# Altium PCB WIFI.PcbDoc
Units mm, origin at the board's own origin, x right, y up, seen from the top; angles counter-clockwise.
Board outline 22.21 x 24 mm, 2 copper layers (Top Layer, Bottom Layer); 9 components, 17 nets, 49 pads, 99 vias.
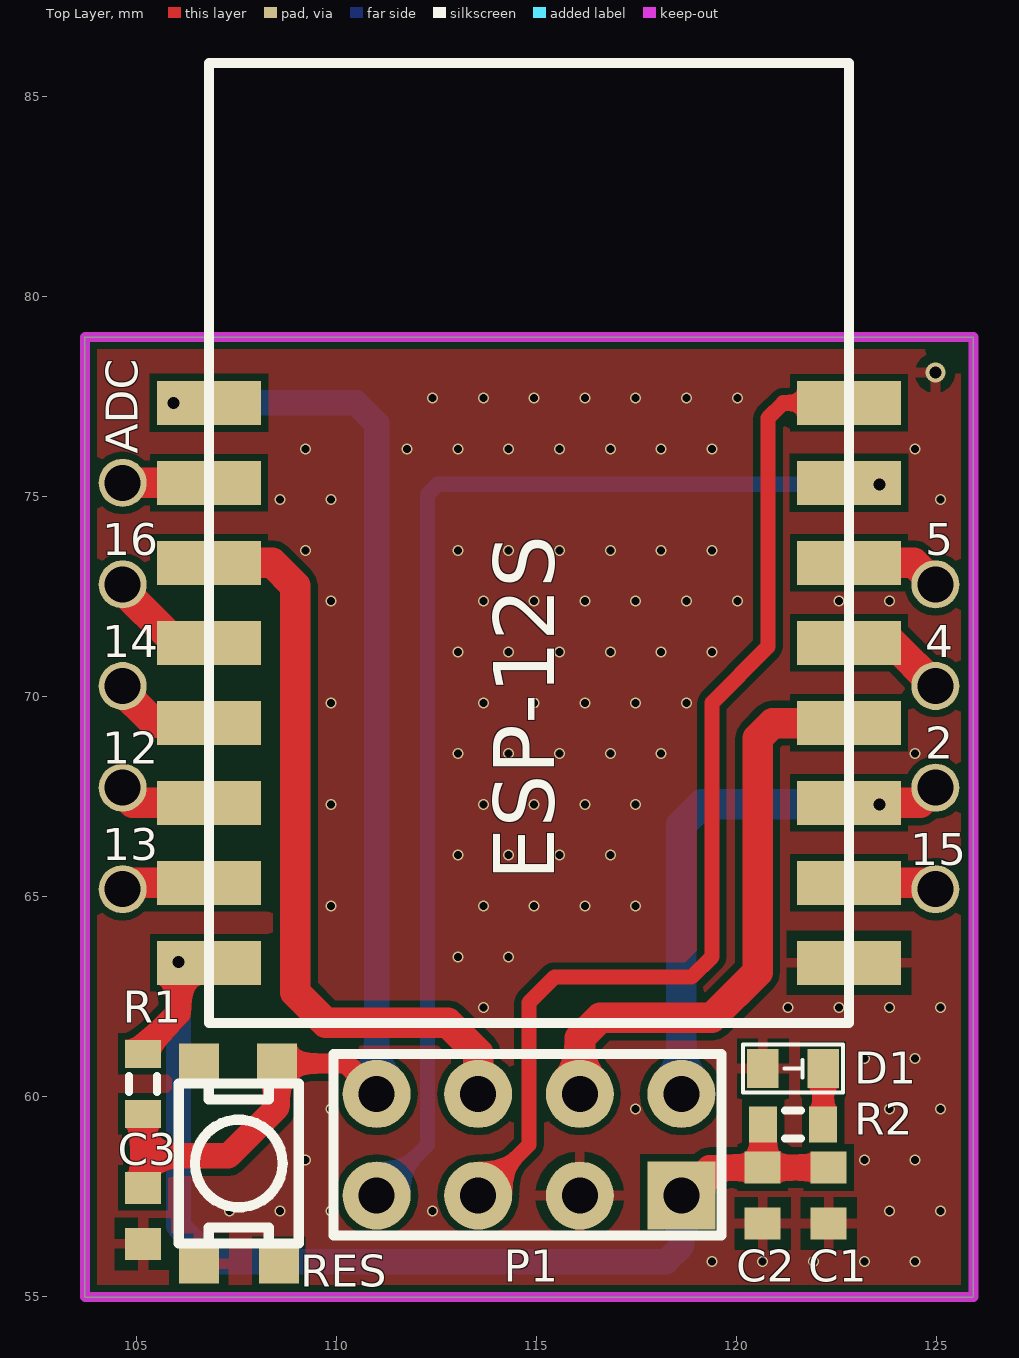
[diagram p0: Top Layer view]
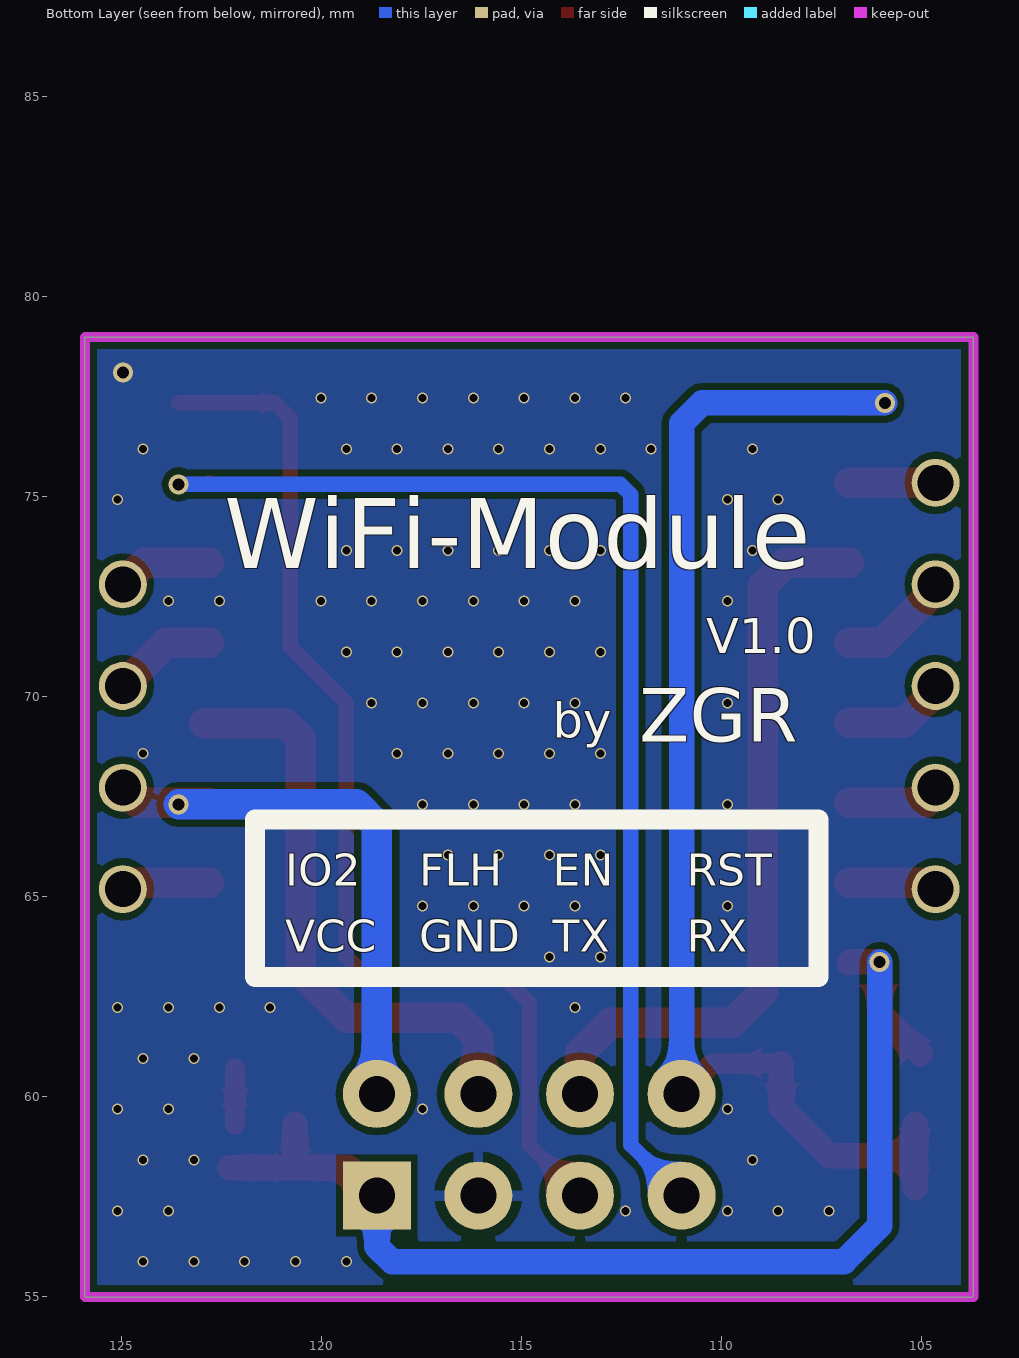
[diagram p1: Bottom Layer view, seen from below]

## Layer stack, top to bottom
Top Solder: solder mask 0.0102, Solder Resist, Dk 3.5
Top Layer: signal copper 0.0356
Dielectric 1: dielectric 0.32, FR-4, Dk 4.8
Bottom Layer: signal copper 0.0356
Bottom Solder: solder mask 0.0102, Solder Resist, Dk 3.5

## Board outline
103.703,54.991 125.917,54.991 125.917,78.994 103.703,78.994

## Design rules (kind name [scope] priority, off if disabled: settings)
Clearance [All] p1: gap=0.178 ignorepadtopadclearanceinfootprint=FALSE
ComponentClearance [All] p1: gap=0.178 collisioncheckmode=3 verticalgap=0.254 showdistances=FALSE
PolygonConnect [All] p1: connectstyle=Relief reliefconductorwidth=0.254 reliefentries=4 polygonreliefangle="90 Angle" airgapwidth=0.254
RoutingVias [All] p1: holewidth=0.711 width=1.27 viastyle="Through Hole" minholewidth=0.2 minwidth=0.275 maxholewidth=0.711 maxwidth=1.27
SolderMaskExpansion [All] p1: expansion=0.102
Width [All] p1: maxlimit=1.016 minlimit=0.178 preferedwidth=0.254 minimp=50.000000 maximp=50.000000 favimp=50.000000
29 further rules are at their usual default settings.

## Components (designator, comment, footprint, x,y, rotation, side; value= is the part's Value field where it differs from the comment)
C1 "Cap Semi" 1608[0603] 122.301,57.531 r270 top value=0.1uf
C2 "Cap Semi" 1608[0603] 120.65,57.531 r270 top value=10uf
C3 "Cap Semi" 1608[0603] 105.156,57.023 r270 top value=0.1uf
D1 "LED" SMD-0603_LED 122.162,60.706 r180 top (schematic designator LED1)
ESP-12S "ESP-12S" ESP-12S 106.807,61.849 r0 top
P1 "Head_4x2" Header_2.54_4*2 118.618,57.531 r180 top
R1 "Res3" J1-0603 105.156,60.325 r90 top value=10K
R2 "Res3" J1-0603 121.412,59.309 r180 top value=10K
RES "SW_Button" "TACK-SW_SMD 2P 4x3mm_2" 109.053,56.333 r180 top (schematic designator SB1)

## Footprints (in the part's own frame and the unit in brackets; to place one, negate y for a bottom-side part, rotate by r counter-clockwise, add the part's x,y. Pads: shape width x height; smd on the part's side, far side on the other; paste and mask are expansions set on the pad)
1608[0603] [mm] "Chip Capacitor, Body 1.6x0.8mm, IPC High Density"
  rect 0.8x0.9 smd: 1(-0.7,0) 2(0.7,0)
  body extent -0.87,-0.48 0.87,0.48, height 1.3
ESP-12S [mm]
  rect 2.6x1.1 smd: 1(0,15.5) 2(0,13.5) 3(0,11.5) 4(0,9.5) 5(0,7.5) 6(0,5.5) 7(0,3.5) 8(0,1.5) 9(16,1.5) 10(16,3.5) 11(16,5.5) 12(16,7.5) 13(16,9.5) 14(16,11.5) 15(16,13.5) 16(16,15.5)
  silkscreen extent 0,0 16,24
Header_2.54_4*2 [mm]
  round 1.7 hole 0.9: 1(0,-2.54) 2(2.54,-2.54) 3(5.08,-2.54) 4(7.62,-2.54) 5(7.62,0) 6(5.08,0) 7(2.54,0)
  rect 1.7x1.7 hole 0.9: 8(0,0)
  silkscreen extent -1,-3.54 8.7,1
J1-0603 [mm] "Chip Resistor, Body 1.6x0.8mm, IPC High Density"
  rect 0.7x0.9 smd: 1(-0.75,0) 2(0.75,0)
  silkscreen extent -0.2,-0.35 0.2,0.35, body extent -0.85,-0.48 0.85,0.48, height 0.9
SMD-0603_LED [mm]
  rect 0.78x0.98 smd: 1(0,0) 2(1.51,0)
  silkscreen extent -0.5,-0.6 2,0.6
"TACK-SW_SMD 2P 4x3mm_2" [mm]
  rect 1x1 smd: 1(0.5,0.5) 1(0.55,-4.5) 2(2.5,0.5) 2(2.5,-4.5)
  silkscreen extent 0,-4 3,0

## Part data
C1 C2 C3: "Capacitor (Semiconductor SIM Model)", LatestRevisionDate=29-May-2009, LatestRevisionNote="IPC-7351 Footprint Added.", PackageDescription="Chip Capacitor", PackageReference=C1206, Published=8-Jun-2000, Publisher="Altium Limited"
R1 R2: "Resistor", LatestRevisionDate=29-May-2009, LatestRevisionNote="IPC-7351 Footprint Added.", PackageDescription="Chip Resistor", PackageReference=J1-0603, Published=8-Jun-2000, Publisher="Altium Limited"

## Free pads (board coordinates)
  round 1.2 hole 0.9: ""(104.648,65.189) ""(104.648,67.729) ""(104.648,70.269) ""(104.648,72.809) ""(104.648,75.349) ""(124.968,65.189) ""(124.968,67.729) ""(124.968,70.269) ""(124.968,72.809)

## Via types
v1: diameter 0.275, hole 0.2, Top Layer to Bottom Layer, tented both sides, 94 vias
v2: diameter 0.5, hole 0.3, Top Layer to Bottom Layer, tented both sides, 5 vias

## Nets (pads, with @x,y where several pads share a name; then routed paths per layer and width w, separated by ;. In a path a pad name is that pad's centre, name@x,y a point inside that pad or via, vN(x,y) a via of type N, cw(c..) or ccw(c..) an arc to the next point about the centre after c; other vN are vias at no path point)
ADC: ESP-12S.2 pad.@104.648,75.349 | length 2.3
  Top Layer w0.762: pad.@104.521,75.349 ESP-12S.2
EN: ESP-12S.3 P1.3 | length 18.8
  Top Layer w0.762: ESP-12S.3 108.388,73.349 108.966,72.771 108.966,62.611 109.728,61.849 112.776,61.849 113.538,61.087 P1.3
flash_mode: ESP-12S.12 P1.2 | length 14.9
  Top Layer w0.762: P1.2 116.078,61.468 116.586,61.976 119.38,61.976 120.523,63.119 120.523,68.961 120.904,69.342 ESP-12S.12@122.936,69.342
GND: C1.2 C2.2 C3.2 D1.2 ESP-12S.9 P1.7 RES.2@106.553,55.833
  other v1: 119.38,55.88 120.65,55.88 121.92,55.88 123.19,55.88 124.46,55.88 107.315,57.15 108.585,57.15 109.855,57.15 112.395,57.15 123.825,57.15 125.095,57.15 109.22,58.42 123.19,58.42 124.46,58.42 109.855,59.69 117.475,59.69 123.825,59.69 125.095,59.69 123.19,60.96 124.46,60.96 113.665,62.23 121.285,62.23 122.555,62.23 123.825,62.23 125.095,62.23 113.03,63.5 114.3,63.5 109.855,64.77 113.665,64.77 114.935,64.77 116.205,64.77 117.475,64.77 113.03,66.04 114.3,66.04 115.57,66.04 116.84,66.04 109.855,67.31 113.665,67.31 114.935,67.31 116.205,67.31 117.475,67.31 113.03,68.58 114.3,68.58 115.57,68.58 116.84,68.58 118.11,68.58 124.46,68.58 109.855,69.85 113.665,69.85 114.935,69.85 116.205,69.85 117.475,69.85 118.745,69.85 113.03,71.12 114.3,71.12 115.57,71.12 116.84,71.12 118.11,71.12 119.38,71.12 109.855,72.39 113.665,72.39 114.935,72.39 116.205,72.39 117.475,72.39 118.745,72.39 120.015,72.39 122.555,72.39 123.825,72.39 109.22,73.66 113.03,73.66 114.3,73.66 115.57,73.66 116.84,73.66 118.11,73.66 119.38,73.66 108.585,74.93 109.855,74.93 125.095,74.93 109.22,76.2 111.76,76.2 113.03,76.2 114.3,76.2 115.57,76.2 116.84,76.2 118.11,76.2 119.38,76.2 124.46,76.2 112.395,77.47 113.665,77.47 114.935,77.47 116.205,77.47 117.475,77.47 118.745,77.47 120.015,77.47
  other v2: 124.968,78.105
IO2: ESP-12S.11 P1.1 pad.@124.968,67.729 | length 14.2
  Top Layer w0.762: ESP-12S.11 124.588,67.349 pad.@124.968,67.729
  Bottom Layer w0.762: P1.1 118.618,66.802 119.126,67.31 v2(123.571,67.31)
IO4: ESP-12S.13 pad.@124.968,70.269 | length 2.6
  Top Layer w0.762: ESP-12S.13 123.888,71.349 pad.@124.968,70.269
IO5: ESP-12S.14 pad.@124.968,72.809 | length 2.4
  Top Layer w0.762: ESP-12S.14 124.428,73.349 pad.@124.968,72.809
IO12: ESP-12S.6 pad.@104.648,67.729 | length 2.4
  Top Layer w0.762: pad.@104.521,67.729 104.901,67.349 ESP-12S.6
IO13: ESP-12S.7 pad.@104.648,65.189 | length 2.2
  Top Layer w0.762: pad.@104.648,65.189 104.808,65.349 ESP-12S.7
IO14: ESP-12S.5 pad.@104.648,70.269 | length 2.7
  Top Layer w0.762: pad.@104.521,70.269 105.441,69.349 ESP-12S.5
IO15: ESP-12S.10 pad.@124.968,65.189 | length 2.2
  Top Layer w0.762: ESP-12S.10 124.808,65.349 pad.@124.968,65.189
IO16: ESP-12S.4 pad.@104.648,72.809 | length 2.9
  Top Layer w0.762: pad.@104.521,72.809 105.981,71.349 ESP-12S.4
NetLED1_1: D1.1 R2.1 | length 1.4
  Top Layer w0.508: R2.1 D1.1
RST: C3.1 ESP-12S.1 P1.4 R1.1 RES.1@108.503,60.833 | length 32.3
  Top Layer w0.508: RES.1@108.503,60.833 110.236,60.833 P1.4
  Top Layer w0.635: C3.1 105.156,58.522 ; R1.1@105.156,59.321 105.156,58.522 ; v2(105.918,77.349) ESP-12S.1 ; RES.1@108.503,60.833 108.503,59.735 107.29,58.522 105.156,58.522
  Bottom Layer w0.635: v2(105.918,77.349) 110.484,77.349 110.998,76.835 P1.4
RX: ESP-12S.15 P1.5 | length 30.2
  Top Layer w0.381: ESP-12S.15 122.845,75.311 v2(123.571,75.311)
  Bottom Layer w0.381: P1.5 112.268,58.801 112.268,75.057 112.522,75.311 v2(123.571,75.311)
TX: ESP-12S.16 P1.6 | length 27.4
  Top Layer w0.381: P1.6 114.808,58.801 114.808,62.357 115.443,62.992 118.872,62.992 119.38,63.5 119.38,69.85 120.783,71.253 120.783,76.968 121.164,77.349 ESP-12S.16 ESP-12S.16@123.571,77.349
VCC: C1.1 C2.1 ESP-12S.8 P1.8 R1.2 R2.2 | length 29.8
  Top Layer w0.635: R1.2@105.029,61.075 106.045,62.091 v2(106.045,63.373) 106.783,63.373 ESP-12S.8 ; P1.8@118.872,57.531 P1.8 119.318,58.231 C2.1 ; R2.2 120.662,58.243 C2.1 ; C1.1 C2.1
  Bottom Layer w0.635: v2(106.045,63.373) 106.045,56.769 106.934,55.88 118.237,55.88 118.618,56.261 P1.8
pads on no net: RES.1@108.553,55.833 RES.2@106.553,60.833

## Polygon pours and split planes (outlines as drawn)
GND on Bottom Layer "GND_L02_P020" (solid, remove dead copper, pour order 20): 103.703,78.994 125.917,78.994 125.917,54.991 103.703,54.991
GND on Top Layer "GND_L01_P024" (solid, remove dead copper, pour order 24): 103.703,78.994 125.917,78.994 125.917,54.991 103.703,54.991

## Keep-outs
Keep-Out Layer:
  lines w0.254: 103.703,54.991 103.703,78.994 109.506,78.994 119.983,78.994 125.917,78.994 125.917,54.991 103.703,54.991

## Silkscreen, mask and mechanical layers (free items; w line width, h text height)
Top Overlay:
  text "ADC" at 105.029,76.073 h0.8 r90
  text "16" at 104.14,73.533 h0.8
  text "5" at 124.714,73.533 h0.8
  text "14" at 104.14,70.993 h0.8
  text "4" at 124.714,70.993 h0.8
  text "2" at 124.714,68.453 h0.8
  text "12" at 104.14,68.326 h0.8
  text "13" at 104.14,65.913 h0.8
  text "15" at 124.333,65.786 h0.8
Bottom Overlay:
  lines w0.5: 107.569,62.992 121.666,62.992 121.666,66.929 107.569,66.929 107.569,62.992
  text "WiFi-Module" at 122.428,72.644 h3
  text "V1.0" at 110.377,70.807 h1.5
  text "by" at 114.221,68.688 h1.5
  text "ZGR" at 112.062,68.434 h2.3
  text "RST" at 110.871,65.278 h0.8
  text "EN" at 114.215,65.278 h0.8
  text "FLH" at 117.56,65.278 h0.8
  text "IO2" at 120.904,65.278 h0.8
  text "RX" at 110.871,63.627 h0.8
  text "TX" at 114.215,63.627 h0.8
  text "GND" at 117.56,63.627 h0.8
  text "VCC" at 120.904,63.627 h0.8